# Altium PCB ePaper_display_pcb.PcbDoc
Units mm, origin at the board's own origin, x right, y up, seen from the top; angles counter-clockwise.
Board outline 12.19 x 23.21 mm, 2 copper layers (Top Layer, Bottom Layer); 22 components, 21 nets, 93 pads, 45 vias.
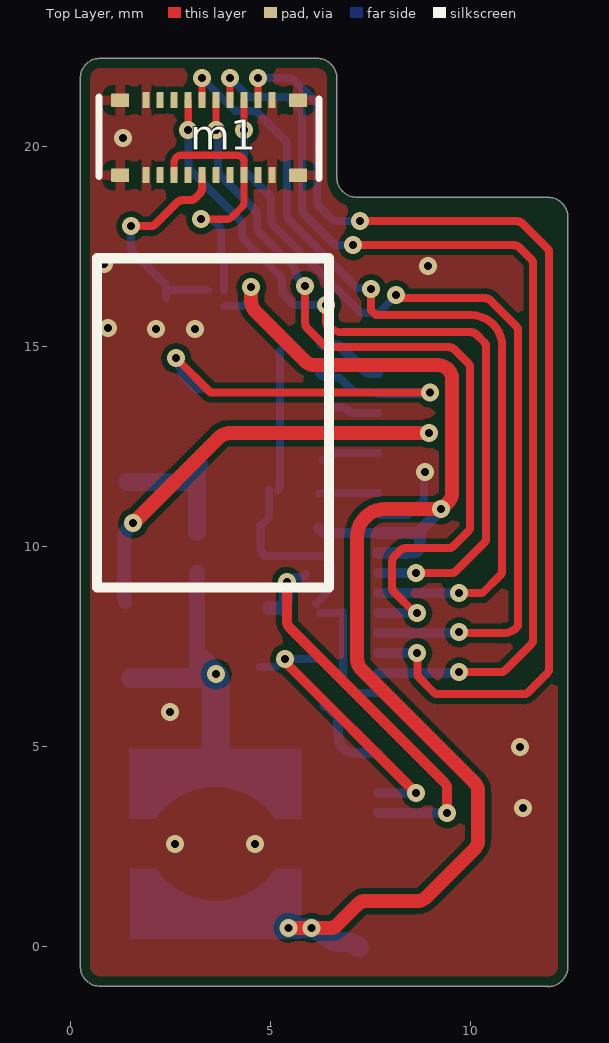
[diagram p0: Top Layer view]
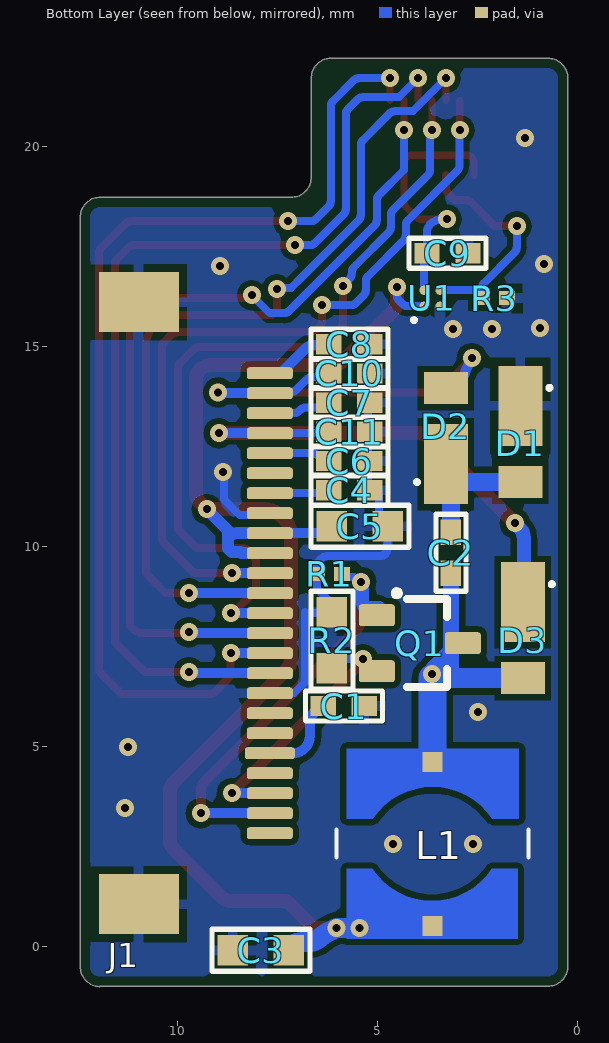
[diagram p1: Bottom Layer view, seen from below]

## Layer stack, top to bottom
Top Solder: solder mask 0.0102, Solder Resist, Dk 3.5
Top Layer: signal copper 0.0356
Dielectric 1: dielectric 0.32, FR-4, Dk 4.8
Bottom Layer: signal copper 0.0356
Bottom Solder: solder mask 0.0102, Solder Resist, Dk 3.5

## Board outline
0.25,-0.5 0.25,21.7 cw(c0.75,21.7) 0.75,22.2 6.166,22.2 cw(c6.165,21.701) 6.664,21.7 6.664,19.225 ccw(c7.164,19.225) 7.164,18.725 11.939,18.725 cw(c11.939,18.225) 12.439,18.225 12.439,-0.511 cw(c11.939,-0.511) 11.939,-1.011 11.95,-1 0.75,-1 cw(c0.75,-0.5)

## Design rules (kind name [scope] priority, off if disabled: settings)
BoardOutlineClearance [All] p1: gap=0.25 ignorepadtopadclearanceinfootprint=FALSE
Clearance [All] p1: gap=0.15 ignorepadtopadclearanceinfootprint=FALSE
ComponentClearance [All] p1 off: gap=0.254 collisioncheckmode=3 verticalgap=0.254 showdistances=FALSE
HoleSize [All] p1: absolutevalues=TRUE maxlimit=0.5 minlimit=0.2 maxpercent=80.000 minpercent=20.000
PolygonConnect [All] p1: thpad.connectstyle=Direct thpad.reliefconductorwidth=0.254 thpad.reliefentries=4 thpad.polygonreliefangle="90 Angle" thpad.airgapwidth=0.254 smdpad.connectstyle=Relief smdpad.reliefconductorwidth=0.254 smdpad.reliefentries=4 smdpad.polygonreliefangle="90 Angle" smdpad.airgapwidth=0.2 via.connectstyle=Direct via.reliefconductorwidth=0.254 via.reliefentries=4 via.polygonreliefangle="90 Angle" via.airgapwidth=0.254
RoutingVias [All] p1: holewidth=0.2 width=0.45 viastyle="Through Hole" minholewidth=0.2 minwidth=0.45 maxholewidth=0.8 maxwidth=1.3
SolderMaskExpansion [All] p1: expansion=0.03 istentingtop=FALSE
Width [All] p1: maxlimit=1 minlimit=0.15 preferedwidth=0.2 checkconnectedcopper=TRUE
28 further rules are at their usual default settings.

## Components (designator, comment, footprint, x,y, rotation, side; value= is the part's Value field where it differs from the comment)
C1 "1uF/25V" 0402C#1 5.336,6.005 r0 bottom
C2 "1uF/25V" 0402C#1 3.175,9.325 r90 bottom
C3 "4.7uF/10V" 0603C 8.625,-0.1 r180 bottom
C4 "1uF/25V" 0402C#1 5.2,11.4 r0 bottom
C5 "4.7uF/10V" 0603C 4.75,10.5 r0 bottom
C6 "1uF/25V" 0402C#1 5.2,12.13 r0 bottom
C7 "1uF/25V" 0402C#1 5.2,13.59 r0 bottom
C8 "1uF/25V" 0402C#1 5.2,15.05 r0 bottom
C9 "1uF/25V" 0402C#2 3.771,17.325 r180 bottom
C10 "1uF/25V" 0402C#3 5.7,14.32 r0 bottom
C11 "1uF/25V" 0402C#3 5.7,12.86 r0 bottom
D1 "RSX051VYM30FHTR" TUMD2M 1.436,12.611 r270 bottom
D2 "RSX051VYM30FHTR" TUMD2M 3.297,12.951 r90 bottom
D3 "RSX051VYM30FHTR" TUMD2M 1.375,7.7 r270 bottom
J1 "ePaper_FPC" SSD1675A_ZIF_24pins 11.3,9.15 r0 bottom
L1 "LPS3314-473MBR" IND_WURTH_WE-TPC_4828 3.637,2.569 r90 bottom
m1 "5046182012" 5046182012_molex_mezz 3.472,20.2 r180 top
Q1 "MOSFET_N" SC-70_3_leads 3.95,7.575 r180 bottom
R1 "100k" 0201R#1 6.225,9.3 r0 bottom
R2 "2R2" 0603R 6.15,6.95 r90 bottom
R3 "100k" 0201R#2 2.075,16.2 r180 bottom
U1 "TPS22916CNYFPT" BGA_4pin_0.8x0.8 3.646,16.2 r90 bottom

## Footprints (in the part's own frame and the unit in brackets; to place one, negate y for a bottom-side part, rotate by r counter-clockwise, add the part's x,y. Pads: shape width x height; smd on the part's side, far side on the other; paste and mask are expansions set on the pad)
0201R#1 [mm] "Chip Resistor, 2-Leads, Body 0.60x0.30mm, IPC Medium Density"
  rect 0.4x0.35 smd: 1(-0.325,0) 2(0.3,0)
  body extent -0.33,-0.17 0.3,0.16, height 0.26
0201R#2 [mm] "Chip Resistor, 2-Leads, Body 0.60x0.30mm, IPC Medium Density"
  rect 0.4x0.35 smd mask+0.04: 1(-0.325,0) 2(0.3,0)
  body extent -0.33,-0.17 0.31,0.17, height 0.26
0402C#1 [mil]
  rect 25x20 smd: 1(0,0) 2(40.35,0)
  silkscreen extent -18,-15 58,15, body extent -6,-10 46,10, height 14
0402C#2 [mil]
  rect 25x20 smd mask+1.57: 1(0,0) 2(40.35,0)
  silkscreen extent -18,-15 58,15, body extent -6,-10 46,10, height 14
0402C#3 [mil]
  rect 25x20 smd mask+1.57: 1(-19.68,0) 2(20.67,0)
  silkscreen extent -37,-15 38,15, body extent -25,-10 26,10, height 14
0603C [mil] "CAPACITOR 0603"
  rect 30x30 smd: 1(0,0) 2(55,0)
  silkscreen extent -21,-21 76,21, body extent -4,-15 59,15, height 19
0603R [mil] "RESISTOR 0603"
  rect 30x30 smd mask+1.57: 1(0,0) 2(55,0)
  silkscreen extent -21,-21 76,21, body extent -4,-15 59,15, height 19
5046182012_molex_mezz [mm] "Molex mezzanine 5046182012"
  rrect10% 0.18x0.4 smd mask+0.03: 1(-1.575,0.925) 2(-1.225,0.925) 3(-0.875,0.925) 4(-0.525,0.925) 5(-0.175,0.925) 6(0.175,0.925) 7(0.525,0.925) 8(0.875,0.925) 9(1.225,0.925) 10(1.575,0.925) 11(1.575,-0.95) 12(1.225,-0.95) 13(0.875,-0.95) 14(0.525,-0.95) 15(0.175,-0.95) 16(-0.175,-0.95) 17(-0.525,-0.95) 18(-0.875,-0.95) 19(-1.225,-0.95) 20(-1.575,-0.95)
  rrect10% 0.455x0.33 smd mask+0.03: h(-2.225,-0.95) h(-2.225,0.925) h(2.225,-0.95) h(2.225,0.925)
  silkscreen extent -2.75,-1.02 2.75,1, body extent -2.82,-1 2.82,1, height 0.6
BGA_4pin_0.8x0.8 [mm] "BGA, 4-Leads, Body 0.78x0.78mmx0.50mm, Pitch 0.40mm"
  round 0.23 smd mask+0.03: A1(-0.2,0.2) A2(0.2,0.2) B1(-0.2,-0.2) B2(0.2,-0.2)
  silkscreen extent -0.6,0.4 -0.5,0.5, body extent -0.39,-0.39 0.39,0.39, height 0.5
IND_WURTH_WE-TPC_4828 [mm] "Shielded Tiny Power Inductor, Body 4.8x4.8mm"
  rect 0.5x0.5 smd: 1(-2.069,0) 2(2.031,0)
  Top Layer region: 0.623,-2.162 2.365,-2.162 2.365,2.138 0.623,2.138 0.623,1.484 1.205,0.837 1.415,-0.007 1.205,-0.852 0.623,-1.499 0.623,-1.499
  Top Layer region: -2.384,-2.137 -0.636,-2.137 -0.636,-1.489 -1.222,-0.842 -1.434,0.006 -1.222,0.853 -0.636,1.501 -0.636,1.501 -0.636,2.138 -2.384,2.138
  silkscreen extent -0.35,-2.4 0.35,2.4, body extent -2.4,-2.4 2.4,2.4, height 2.8
SC-70_3_leads [mm] "SC-70_3_leads_GDS"
  rrect25% 0.9x0.55 smd mask+0.03: D(1.075,0) G(-1.075,0.7) S(-1.075,-0.7)
  silkscreen extent -0.65,-1.1 0.67,1.32, body extent -1.3,-1.1 1.3,1.1, height 1
SSD1675A_ZIF_24pins [mm]
  rrect50% 1.15x0.3 smd: 1(-3.6,6.325) 2(-3.6,5.825) 3(-3.6,5.325) 4(-3.6,4.825) 6(-3.6,3.825) 7(-3.6,3.325) 8(-3.6,2.825) 9(-3.6,2.325) 10(-3.6,1.825) 11(-3.6,1.325) 12(-3.6,0.825) 13(-3.6,0.325) 14(-3.6,-0.175) 15(-3.6,-0.675) 16(-3.6,-1.175) 17(-3.6,-1.675) 18(-3.6,-2.175) 19(-3.6,-2.675) 20(-3.6,-3.175) 21(-3.6,-3.675) 22(-3.6,-4.175) 23(-3.6,-4.675) 24(-3.6,-5.175)
  rrect50% 1.25x0.3 smd: 5(-3.6,4.325)
  rect 2x1.5 smd: GND(-0.325,-6.95) GND(-0.325,8.1)
TUMD2M [mm] "SOD323HE"
  rect 0.8x1.1 smd: A(1,0)
  rect 2x1.1 smd: K(-0.9,0)
  silkscreen extent -1.4,0.67 -1.3,0.77, body extent -1.45,-0.75 1.05,0.75, height 0.7

## Part data
C1 C2 C4 C6 C7 C8 C9 C10 C11: library part 0603C-GENERIC, "CAPACITOR 0603 CERAMIC GENERIC", Manufacturer=MURATA, Manufacturer Part Number=GRM155R61E105KA12D, Supplier Part Number=2218855, Supplier=Farnell
C3 C5: library part 0805C-TBD, "CAPACITOR 0603 CERAMIC", Manufacturer=TDK, Manufacturer Part Number=C1608X5R1E475K080AC, Supplier Part Number=2525101, Supplier=Farnell
D1 D2 D3: library part Shotkey_diode, Manufacturer=ROHM, Supplier Part Number=2581630, Manufacturer Part Number=RSX051VYM30FHTR, Supplier=Farnell
J1: library part SSD1675A_ePaper, Manufacturer="Omron Electronics", Manufacturer Part Number=XF3M-2415-1B, Supplier Part Number=653-XF3M-2415-1B, Supplier=Mouser
L1: library part INDUCTOR, "INDUCTOR", Manufacturer=Coilcraft, Manufacturer Part Number=LPS3314-473MRB, Supplier Part Number=994-LPS3314-473MRB, Supplier=Mouser
m1: library part 5046182012_molex_mezz, Manufacturer=Molex, Supplier Part Number=538-504618-2012, Manufacturer Part Number=5046182012, Supplier=Mouser
Q1: Manufacturer="Vishay / Siliconix", Manufacturer Part Number=SI1308EDL-T1-BE3, Supplier Part Number=78-SI1308EDL-T1-BE3, Supplier=Mouser
R1 R3: library part Resistor
R2: library part Resistor, Manufacturer=PANASONIC, Manufacturer Part Number=ERJP03J2R2V, Supplier Part Number=1750637, Supplier=Farnell
U1: library part TPS22916_Lsw, Manufacturer=TI, Supplier Part Number=595-TPS22916CNYFPT, Manufacturer Part Number=TPS22916CNYFPT, Supplier=Mouser

## Via types
v1: diameter 0.45, hole 0.2, Top Layer to Bottom Layer, tented both sides, 45 vias

## Nets (pads, with @x,y where several pads share a name; then routed paths per layer and width w, separated by ;. In a path a pad name is that pad's centre, name@x,y a point inside that pad or via, vN(x,y) a via of type N, cw(c..) or ccw(c..) an arc to the next point about the centre after c; other vN are vias at no path point)
3V3_SW: C3.2 C5.2 J1.15 J1.16 L1.1 U1.A1 | length 36.3
  Top Layer w0.35: v1(4.525,16.475) 4.525,16.12 ccw(c4.875,16.12) 4.628,15.872 5.872,14.628 ccw(c6.12,14.875) 6.12,14.525 9.2,14.525 cw(c9.2,14.175) 9.55,14.174 9.55,11.345 cw(c9.2,11.345) 9.447,11.097 v1(9.275,10.925) 7.862,10.925 ccw(c7.862,10.238) 7.175,10.238 7.175,7.168 ccw(c7.525,7.17) 7.278,6.922 10.097,4.103 cw(c9.85,3.855) 10.2,3.855 10.2,2.67 cw(c9.85,2.67) 10.097,2.422 8.903,1.228 cw(c8.655,1.475) 8.655,1.125 7.349,1.125 ccw(c7.349,0.925) 7.208,1.066 6.661,0.52 cw(c6.52,0.661) 6.52,0.461 v1(6.037,0.461) v1(5.452,0.461)
  Bottom Layer w0.2: U1.A1 4.242,16 ccw(c4.242,16.2) 4.384,16.059 4.466,16.141 ccw(c4.325,16.283) 4.525,16.283 v1(4.525,16.475)
  Bottom Layer w0.25: C5.2@6.2,10.45 6.252,10.398 ccw(c6.429,10.575) 6.429,10.325 6.831,10.325 J1.16
  Bottom Layer w0.3: J1.15 8.408,9.825 8.433,9.85 8.65,9.85 8.74,9.94 8.74,10.39 v1(9.275,10.925) ; J1.16 8.526,10.325 cw(c8.526,10.023) 8.725,10.25
  Bottom Layer w0.5: L1.1 3.777,0.599 cw(c4.066,0.191) 4.151,0.684 v1(5.452,0.461) v1(6.037,0.461) ccw(c6.344,0.856) 6.144,0.398 6.249,0.351 cw(c6.05,-0.107) 6.404,0.246 ccw(c6.757,0.6) 6.757,0.1 6.893,0.1 cw(c6.893,-0.4) 7.216,-0.018 7.224,-0.024 C3.2@7.225,-0.026
GND: C1.1 C3.1 C4.1 C5.1 C6.1 C7.1 C8.1 C9.2 C10.1 C11.1 D1.K J1.8 J1.17 J1.GND m1.1 m1.10 m1.11 m1.20 m1.h R1.2 R2.2 R3.2 U1.B1 | length 13.5
  Bottom Layer w0.2: C5.1 4.975,10.725 C4.1@4.975,11.4 ; C5.1@4.756,10.5 4.756,9.95 ccw(c4.956,9.95) 4.956,9.75 6.267,9.75 cw(c6.267,9.55) 6.409,9.691 6.525,9.575 6.525,8.947 R2.2@6.15,8.572 ; C4.1 ccw(c5.04,11.52) 5.24,11.521 C8.1@5.24,14.891 ; R2.2@6.25,8.325 6.8,8.325 6.825,8.35 6.825,6.6 7.1,6.325 J1.8 ; J1.17 7.75,10.775 8.45,10.775 8.85,11.175 v1@8.85,11.85
  other v1: 2.625,2.55 4.625,2.55 11.319,3.455 11.25,4.975 2.5,5.85 8.875,11.85 2.15,15.425 3.125,15.425 0.95,15.45 8.95,17 0.85,17.05 1.325,20.2
NetC1_2: C1.2 J1.5 | length 2.2
  Bottom Layer w0.25: C1.2 6.424,6.005 6.627,5.803 cw(c6.45,5.626) 6.7,5.626 6.7,5.252 ccw(c7.125,5.25) 7.125,4.825 J1.5
NetC2_1: C2.1 D3.A L1.2 Q1.D | length 6.5
  Bottom Layer w0.4: 3.175,6.85 Q1.D@3.175,7.443 ; Q1.D@3.175,7.441 Q1.D@3.175,7.443 ; C2.1 3.175,8.814 Q1.D@3.175,7.443 ; v1@3.636,6.8 v1(3.65,6.8)
  Bottom Layer w0.5: D3.A@1.525,6.7 3.175,6.7 3.44,6.7 v1@3.625,6.7
  Bottom Layer w0.7: L1.2@3.637,4.816 v1@3.637,6.7
NetC2_2: C2.2 D1.A D2.K | length 3.8
  Bottom Layer w0.25: D2.K@2.856,11.611 D2.K@3.277,12.032 ; D2.K@3.278,12.032 D2.K
  Bottom Layer w0.35: D2.K@3.175,11.785 cw(c3.525,11.785) D2.K@3.277,12.032
  Bottom Layer w0.45: D1.A D2.K@2.856,11.611 ; C2.2 D2.K@3.175,11.785
NetC4_2: C4.2 J1.18 | length 1.5
  Bottom Layer w0.2: C4.2@6.225,11.3 6.25,11.325 J1.18
NetC6_2: C6.2 J1.20 | length 1.4
  Bottom Layer w0.2: C6.2@6.325,12.15 ccw(c6.3,12.348) 6.442,12.207 6.501,12.266 cw(c6.643,12.125) 6.641,12.325 6.642,12.325 J1.20
NetC7_2: C7.2 J1.22 | length 1.3
  Bottom Layer w0.2: C7.2@6.45,13.513 ccw(c6.573,13.671) 6.573,13.471 6.795,13.471 cw(c6.796,13.271) 6.938,13.412 6.966,13.384 ccw(c7.108,13.525) 7.108,13.325 J1.22
NetC8_2: C8.2 J1.24 | length 1.7
  Bottom Layer w0.25: C8.2@6.275,15.05 ccw(c6.384,15.275) 6.384,15.025 6.62,15.025 cw(c6.621,14.775) 6.799,14.951 J1.24@7.352,14.398 ; J1.24@7.353,14.397 ccw(c7.529,14.575) 7.529,14.325 J1.24
NetC10_2: C10.2 D2.A J1.23 | length 10.5
  Top Layer w0.2: v1(2.65,14.7) 3.504,13.846 v1(8.991,13.846)
  Bottom Layer w0.2: C10.2 6.261,14.284 ccw(c6.403,14.425) 6.403,14.225 6.642,14.225 cw(c6.642,14.025) 6.784,14.166 7.041,13.909 ccw(c7.183,14.05) 7.183,13.85 J1.23@7.475,13.85
  Bottom Layer w0.25: v1(2.65,14.7) 2.712,14.638 2.712,14.629 ccw(c2.962,14.63) 2.742,14.513 2.784,14.433 cw(c2.564,14.315) 2.802,14.39 2.826,14.317 ccw(c3.064,14.392) 2.887,14.216 3.151,13.951 D2.A ; J1.23 8.891,13.825 ccw(c8.891,14.075) v1(8.991,13.846) v1@9,13.85
NetC11_2: C11.2 D3.K J1.21 | length 13.1
  Top Layer w0.35: v1(1.575,10.575) 3.722,12.722 cw(c3.97,12.475) 3.969,12.825 3.97,12.825 v1(8.975,12.825)
  Bottom Layer w0.2: C11.2@6.3,12.85 6.325,12.825 J1.21
  Bottom Layer w0.25: J1.21 v1(8.975,12.825)
  Bottom Layer w0.35: D3.K cw(c1.7,8.73) 1.35,8.73 1.35,10.205 cw(c1.7,10.205) 1.453,10.453 v1(1.575,10.575)
NetJ1_2: J1.2 Q1.G R1.1 | length 10.8
  Top Layer w0.25: v1(5.415,9.111) 5.415,8.139 ccw(c5.665,8.139) 5.488,7.962 9.351,4.099 cw(c9.175,3.921) 9.425,3.921 v1(9.425,3.325)
  Bottom Layer w0.2: v1@5.35,9.1 5.4,9.1 5.472,9.1 5.597,9.225 5.825,9.225 R1.1
  Bottom Layer w0.25: J1.2 v1(9.425,3.325)
  Bottom Layer w0.35: Q1.G@4.975,8.45 5.025,8.45 Q1.G@5.3,8.45 ; v1@5.4,9.1 5.4,8.695 cw(c5.05,8.695) Q1.G@5.3,8.45 ; Q1.G@5.3,8.45 cw(c5.05,8.695) 5.297,8.447 Q1.G@5.3,8.45
NetJ1_3: J1.3 Q1.S R2.1 | length 7
  Top Layer w0.25: v1@5.444,7.031 v1(8.65,3.825)
  Bottom Layer w0.2: Q1.S@4.75,6.975 5.13,6.975 5.33,7.175 v1(5.373,7.175) R2.1@6.15,7.175
  Bottom Layer w0.25: J1.3 v1(8.65,3.825)
NetJ1_9: J1.9 m1.17 | length 25.1
  Top Layer w0.125: v1@3.997,21.697 v1(4,21.7)
  Top Layer w0.18: m1.17 v1@3.997,21.697
  Top Layer w0.2: v1(7.075,17.525) 11.092,17.525 cw(c11.092,17.325) 11.234,17.466 11.516,17.184 cw(c11.375,17.042) 11.575,17.043 ; v1(9.725,6.85) 10.742,6.85 ccw(c10.742,7.05) 10.884,6.909 11.516,7.541 ccw(c11.375,7.683) 11.575,7.683 11.575,17.042
  Bottom Layer w0.2: v1(4,21.7) 4.475,21.225 5.367,21.225 cw(c5.367,21.025) 5.509,21.166 5.741,20.934 cw(c5.6,20.792) 5.8,20.791 5.8,18.433 ccw(c6,18.433) 5.859,18.291 6.566,17.584 ccw(c6.708,17.725) 6.708,17.525 v1(7.075,17.525)
  Bottom Layer w0.25: J1.9 v1@9.725,6.825
NetJ1_10: J1.10 m1.19 | length 26.8
  Top Layer w0.18: m1.19 v1@4.697,21.697
  Top Layer w0.2: v1@4.697,21.697 v1(4.7,21.7) ; v1(7.25,18.125) 11.167,18.125 cw(c11.167,17.925) 11.309,18.066 11.916,17.459 cw(c11.775,17.317) 11.975,17.317 11.975,6.958 cw(c11.775,6.958) 11.916,6.816 11.459,6.359 cw(c11.317,6.5) 11.317,6.3 9.215,6.3 cw(c9.215,6.5) 9.073,6.359 8.742,6.69 cw(c8.884,6.831) 8.684,6.831 8.684,7.316 v1(8.675,7.325)
  Bottom Layer w0.2: v1(4.7,21.7) 5.467,21.7 cw(c5.467,21.5) 5.609,21.641 6.116,21.134 cw(c5.975,20.992) 6.175,20.992 6.175,18.633 ccw(c6.375,18.633) 6.234,18.491 6.541,18.184 ccw(c6.683,18.325) 6.683,18.125 v1(7.25,18.125)
  Bottom Layer w0.25: J1.10 v1(8.675,7.325)
NetJ1_11: J1.11 m1.18 | length 22
  Top Layer w0.125: v1@4.347,20.403 v1(4.35,20.4)
  Top Layer w0.18: v1@4.347,20.403 m1.18
  Top Layer w0.2: v1@8.058,16.2 10.367,16.2 cw(c10.367,16) 10.508,16.142 11.141,15.509 cw(c11,15.367) 11.2,15.367 11.2,8.089 cw(c11,8.088) 11.111,7.921 cw(c10.792,8.401) 10.792,7.825 9.822,7.825 cw(c9.822,8.025) v1(9.725,7.85)
  Bottom Layer w0.2: v1(4.35,20.4) 4.35,19.4 4.966,18.784 cw(c4.825,18.642) 5.025,18.642 5.025,18.158 ccw(c5.225,18.158) 5.084,18.016 7.216,15.884 ccw(c7.358,16.025) 7.358,15.825 7.7,15.825 v1(8.15,16.275)
  Bottom Layer w0.25: J1.11 v1@9.725,7.825
NetJ1_12: J1.12 m1.16 | length 19.9
  Top Layer w0.125: v1@3.647,20.403 v1(3.65,20.4)
  Top Layer w0.18: v1@3.647,20.403 m1.16
  Top Layer w0.2: v1(5.875,16.5) 5.875,15.583 ccw(c6.075,15.583) 5.933,15.442 6.341,15.034 ; 6.342,15.033 ccw(c6.483,15.175) 6.483,14.975 9.467,14.975 cw(c9.467,14.775) 9.609,14.916 9.941,14.584 cw(c9.8,14.442) 10,14.442 10,10.508 cw(c9.8,10.508) 9.941,10.366 9.584,10.009 cw(c9.442,10.15) 9.442,9.95 8.383,9.95 ccw(c8.383,9.75) 8.241,9.891 8.109,9.759 ; 8.108,9.758 ccw(c8.25,9.617) 8.05,9.617 8.05,8.983 ccw(c8.25,8.983) 8.109,8.841 8.625,8.325 v1(8.675,8.325)
  Bottom Layer w0.2: v1(3.65,20.4) 3.698,20.352 3.698,19.41 ccw(c3.898,19.41) 3.756,19.269 4.616,18.409 cw(c4.475,18.267) 4.675,18.267 4.675,17.983 ccw(c4.875,17.983) 4.734,17.841 5.55,17.025 ; 5.591,16.984 cw(c5.45,16.842) 5.65,16.843 ; 5.65,16.842 5.65,16.828 ccw(c5.85,16.828) 5.709,16.686 5.875,16.52 v1(5.875,16.5)
  Bottom Layer w0.25: J1.12 v1(8.675,8.325)
NetJ1_13: J1.13 m1.15 | length 21.3
  Top Layer w0.125: v1@3.297,21.697 v1(3.3,21.7)
  Top Layer w0.18: m1.15 v1@3.297,21.697
  Top Layer w0.2: v1(7.525,16.425) 7.525,15.892 7.642,15.775 10.025,15.775 cw(c10.025,15) 10.8,15 10.8,9.408 cw(c10.6,9.408) 10.741,9.266 10.3,8.825 v1(9.725,8.825)
  Bottom Layer w0.125: v1@9.7,8.825 v1@9.725,8.85
  Bottom Layer w0.2: v1(3.3,21.7) 4.125,20.875 4.567,20.875 cw(c4.567,20.675) 4.709,20.816 5.366,20.159 cw(c5.225,20.017) 5.425,20.017 5.425,18.283 ccw(c5.625,18.283) 5.484,18.141 6.891,16.734 7.175,16.45 v1@7.55,16.45
  Bottom Layer w0.25: J1.13 v1@9.7,8.825
NetJ1_14: J1.14 m1.14 | length 19.6
  Top Layer w0.125: m1.14 m1.14@2.95,21.147
  Top Layer w0.18: v1(2.95,20.4) m1.14@2.95,21.147
  Top Layer w0.2: v1(6.4,16.025) 6.4,15.611 ccw(c6.6,15.611) 6.501,15.437 ccw(c6.833,16.029) 6.833,15.35 6.835,15.35 10.017,15.35 cw(c10.017,15.15) 10.159,15.291 10.34,15.11 cw(c10.198,14.969) 10.342,15.108 cw(c10.2,14.967) 10.4,14.967 ; v1(8.65,9.325) 9.505,9.325 ccw(c9.505,9.525) 9.647,9.384 10.341,10.078 ccw(c10.2,10.22) 10.4,10.22 10.4,14.966
  Bottom Layer w0.2: v1(2.95,20.4) 2.959,20.391 2.959,19.523 ccw(c3.159,19.524) 3.017,19.383 4.241,18.159 cw(c4.1,18.017) 4.3,18.018 ; 4.3,18.017 4.3,17.781 ccw(c4.5,17.783) 4.359,17.641 5.241,16.759 cw(c5.1,16.617) 5.3,16.618 ; 5.3,16.617 5.3,16.408 ccw(c5.5,16.408) 5.359,16.266 5.541,16.084 ccw(c5.683,16.225) 5.683,16.025 v1@6.468,16.025
  Bottom Layer w0.25: J1.14 v1(8.65,9.325)
Netm1_6: m1.6 R3.1 U1.B2 | length 5.7
  Top Layer w0.2: v1(1.525,18) 1.992,18 ccw(c1.992,18.2) 2.134,18.059 2.666,18.591 cw(c2.808,18.45) 2.807,18.65 ; 2.808,18.65 2.992,18.65 ccw(c2.992,18.85) 3.133,18.708 3.238,18.813 ccw(c3.097,18.954) 3.297,18.954 m1.6
  Bottom Layer w0.2: v1(1.525,18) 1.525,17.483 ccw(c1.725,17.483) 1.584,17.341 2.341,16.584 cw(c2.2,16.442) 2.4,16.442 2.4,16.4 ; R3.1 2.4,16.4 ; U1.B2 2.4,16.4
VCC_3V3: C9.1 m1.3 m1.8 U1.A2 | length 6.6
  Top Layer w0.18: m1.8 2.597,19.595 cw(c2.777,19.595) 2.777,19.775 4.167,19.775 cw(c4.167,19.595) 4.347,19.595 m1.3 4.347,18.609 cw(c4.167,18.609) 4.294,18.481 4.04,18.228 cw(c3.913,18.355) 3.913,18.175 v1@3.402,18.175
  Bottom Layer w0.125: C9.1 C9.1@3.846,17.25
  Bottom Layer w0.2: v1(3.275,18.175) 3.401,18.175 3.403,18.175 cw(c3.402,17.787) 3.705,18.03 cw(c3.472,17.843) 3.771,17.843 3.771,17.841 C9.1 ; U1.A2 C9.1@3.846,17.25
pads on no net: J1.1 J1.4 J1.6 J1.7 J1.19 m1.2 m1.4 m1.5 m1.7 m1.9 m1.12 m1.13

## Polygon pours and split planes (outlines as drawn)
GND on Bottom Layer "Bottom Layer-GND" (solid, remove dead copper, pour order 0): 0.25,-0.5 0.25,21.7 cw(c0.75,21.7) 0.75,22.2 6.166,22.2 cw(c6.165,21.701) 6.664,21.7 6.664,19.225 ccw(c7.164,19.225) 7.164,18.725 11.939,18.725 cw(c11.939,18.225) 12.439,18.225 12.439,-0.511 cw(c11.939,-0.511) 11.939,-1.011 11.95,-1 0.75,-1 cw(c0.75,-0.5)
GND on Top Layer "Top Layer-GND" (solid, pour order 1): 0.25,-0.5 0.25,21.7 cw(c0.75,21.7) 0.75,22.2 6.166,22.2 cw(c6.165,21.701) 6.664,21.7 6.664,19.225 ccw(c7.164,19.225) 7.164,18.725 11.939,18.725 cw(c11.939,18.225) 12.439,18.225 12.439,-0.511 cw(c11.939,-0.511) 11.939,-1.011 11.95,-1 0.75,-1 cw(c0.75,-0.5)

## Other copper
Bottom Layer:
  region net NetC2_1: 3.3,7.525 3.775,7.05 3.775,7 3.475,7 3.175,6.7

## Silkscreen, mask and mechanical layers (free items; w line width, h text height)
Top Overlay:
  lines w0.254: 0.672,8.97 6.472,8.97 6.472,17.2 0.672,17.2 0.672,8.97
Top Assembly:
  lines w0.254: 11.939,-1.011 ccw(c11.939,-0.511) 12.439,-0.511 12.439,18.225 ccw(c11.939,18.225) 11.939,18.725 7.164,18.725 cw(c7.164,19.225) 6.664,19.225 6.664,21.7 ccw(c6.165,21.701) 6.166,22.2 0.75,22.2 ccw(c0.75,21.7) 0.25,21.7 0.25,-0.5 ccw(c0.75,-0.5) 0.75,-1 11.95,-1
Mechanical 3:
  lines w0.1: 3.1,20.25 4,20.25 ; 3.55,19.825 3.55,20.675 ; 0.725,19.025 6.225,19.025 6.225,21.375 0.725,21.375 0.725,19.025
  text "m1" at 0.975,20.625 h0.6
Mechanical 15:
  lines w0.1: 3,9.85 3.35,9.85 ; 3.025,17.325 3.425,17.325 ; 3.175,9.65 3.175,10.05 ; 3.225,17.15 3.225,17.5 ; 5.138,10.5 5.713,10.5 ; 5.425,10.213 5.425,10.788 ; 5.475,11.4 5.875,11.4 ; 5.475,12.15 5.875,12.15 ; 5.5,13.575 5.9,13.575 ; 5.5,15.075 5.9,15.075 ; 5.65,5.975 6.05,5.975 ; 5.675,11.225 5.675,11.575 ; 5.675,11.975 5.675,12.325 ; 5.7,13.4 5.7,13.75 ; 5.7,14.9 5.7,15.25 ; 5.85,5.8 5.85,6.15 ; 5.863,7.85 6.438,7.85 ; 6.15,7.562 6.15,8.137 ; 7.638,-0.1 8.213,-0.1 ; 7.925,-0.387 7.925,0.188 ; 2.375,17.025 4.075,17.025 4.075,17.65 2.375,17.65 2.375,17.025 ; 2.875,9 3.5,9 3.5,10.7 2.875,10.7 2.875,9 ; 4.338,10.063 6.513,10.063 6.513,10.938 4.338,10.938 4.338,10.063 ; 4.825,11.075 4.825,11.7 6.525,11.7 6.525,11.075 4.825,11.075 ; 4.825,11.825 6.525,11.825 6.525,12.45 4.825,12.45 4.825,11.825 ; 4.85,13.25 4.85,13.875 6.55,13.875 6.55,13.25 4.85,13.25 ; 4.85,14.75 4.85,15.375 6.55,15.375 6.55,14.75 4.85,14.75 ; 5,5.675 5,6.3 6.7,6.3 6.7,5.675 5,5.675 ; 5.713,6.763 6.588,6.763 6.588,8.938 5.713,8.938 5.713,6.763 ; 6.837,-0.537 6.837,0.337 9.012,0.337 9.012,-0.537 6.837,-0.537 ; 6.85,0.5 6.85,16.95 13.3,16.95 13.3,0.5 6.85,0.5